# Altium PCB Multivibrator.PcbDoc
Units mm, origin at the board's own origin, x right, y up, seen from the top; angles counter-clockwise.
Board outline 100 x 100 mm, 2 copper layers (Top Layer, Bottom Layer); 9 components, 6 nets, 20 pads, 0 vias.
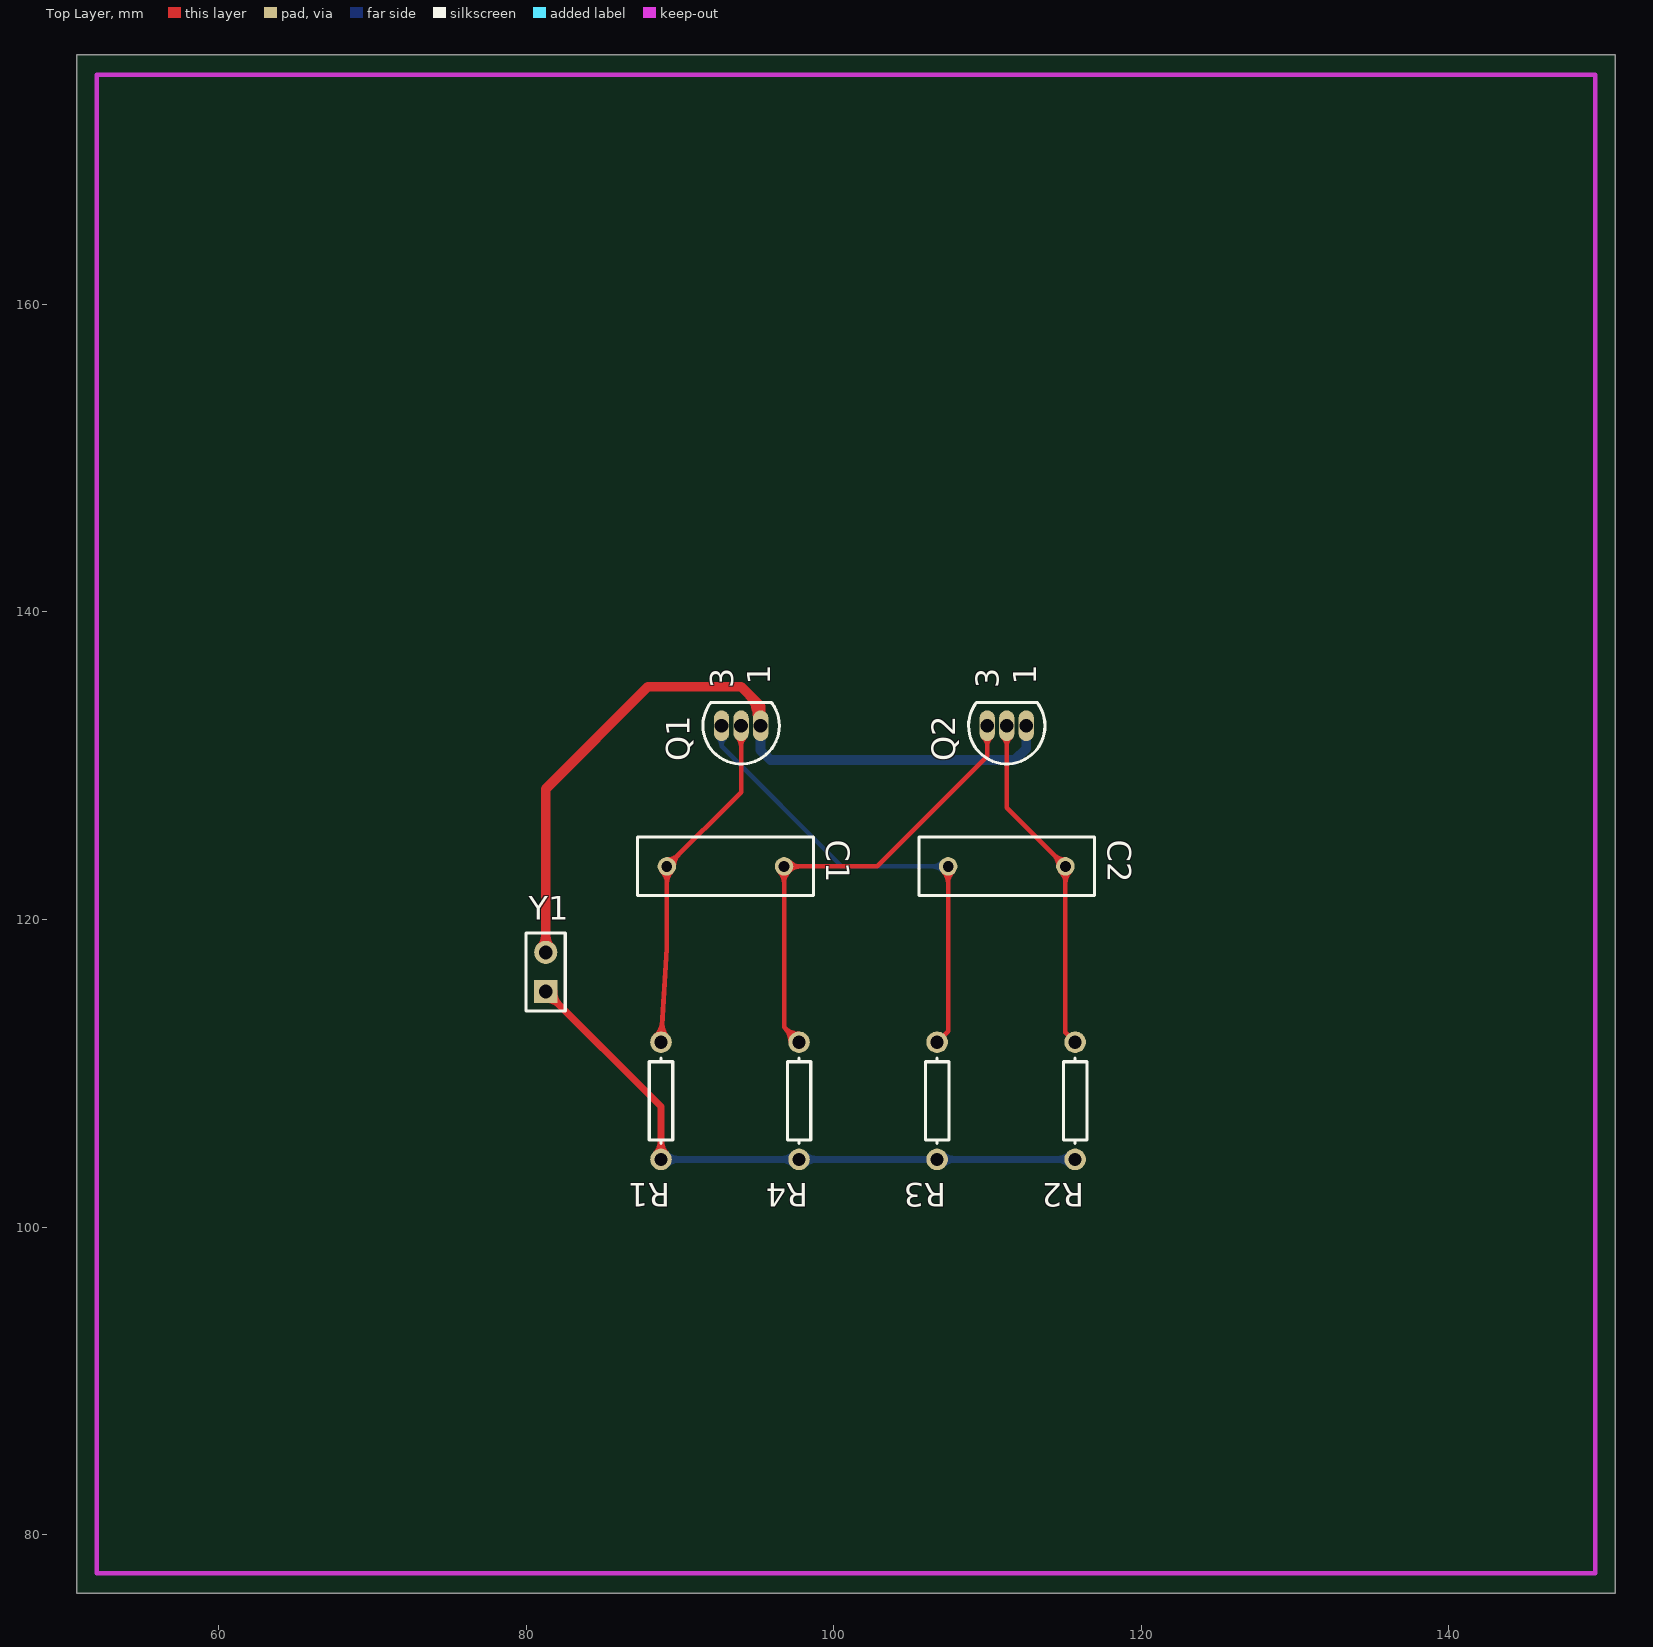
[diagram p0: Top Layer view]
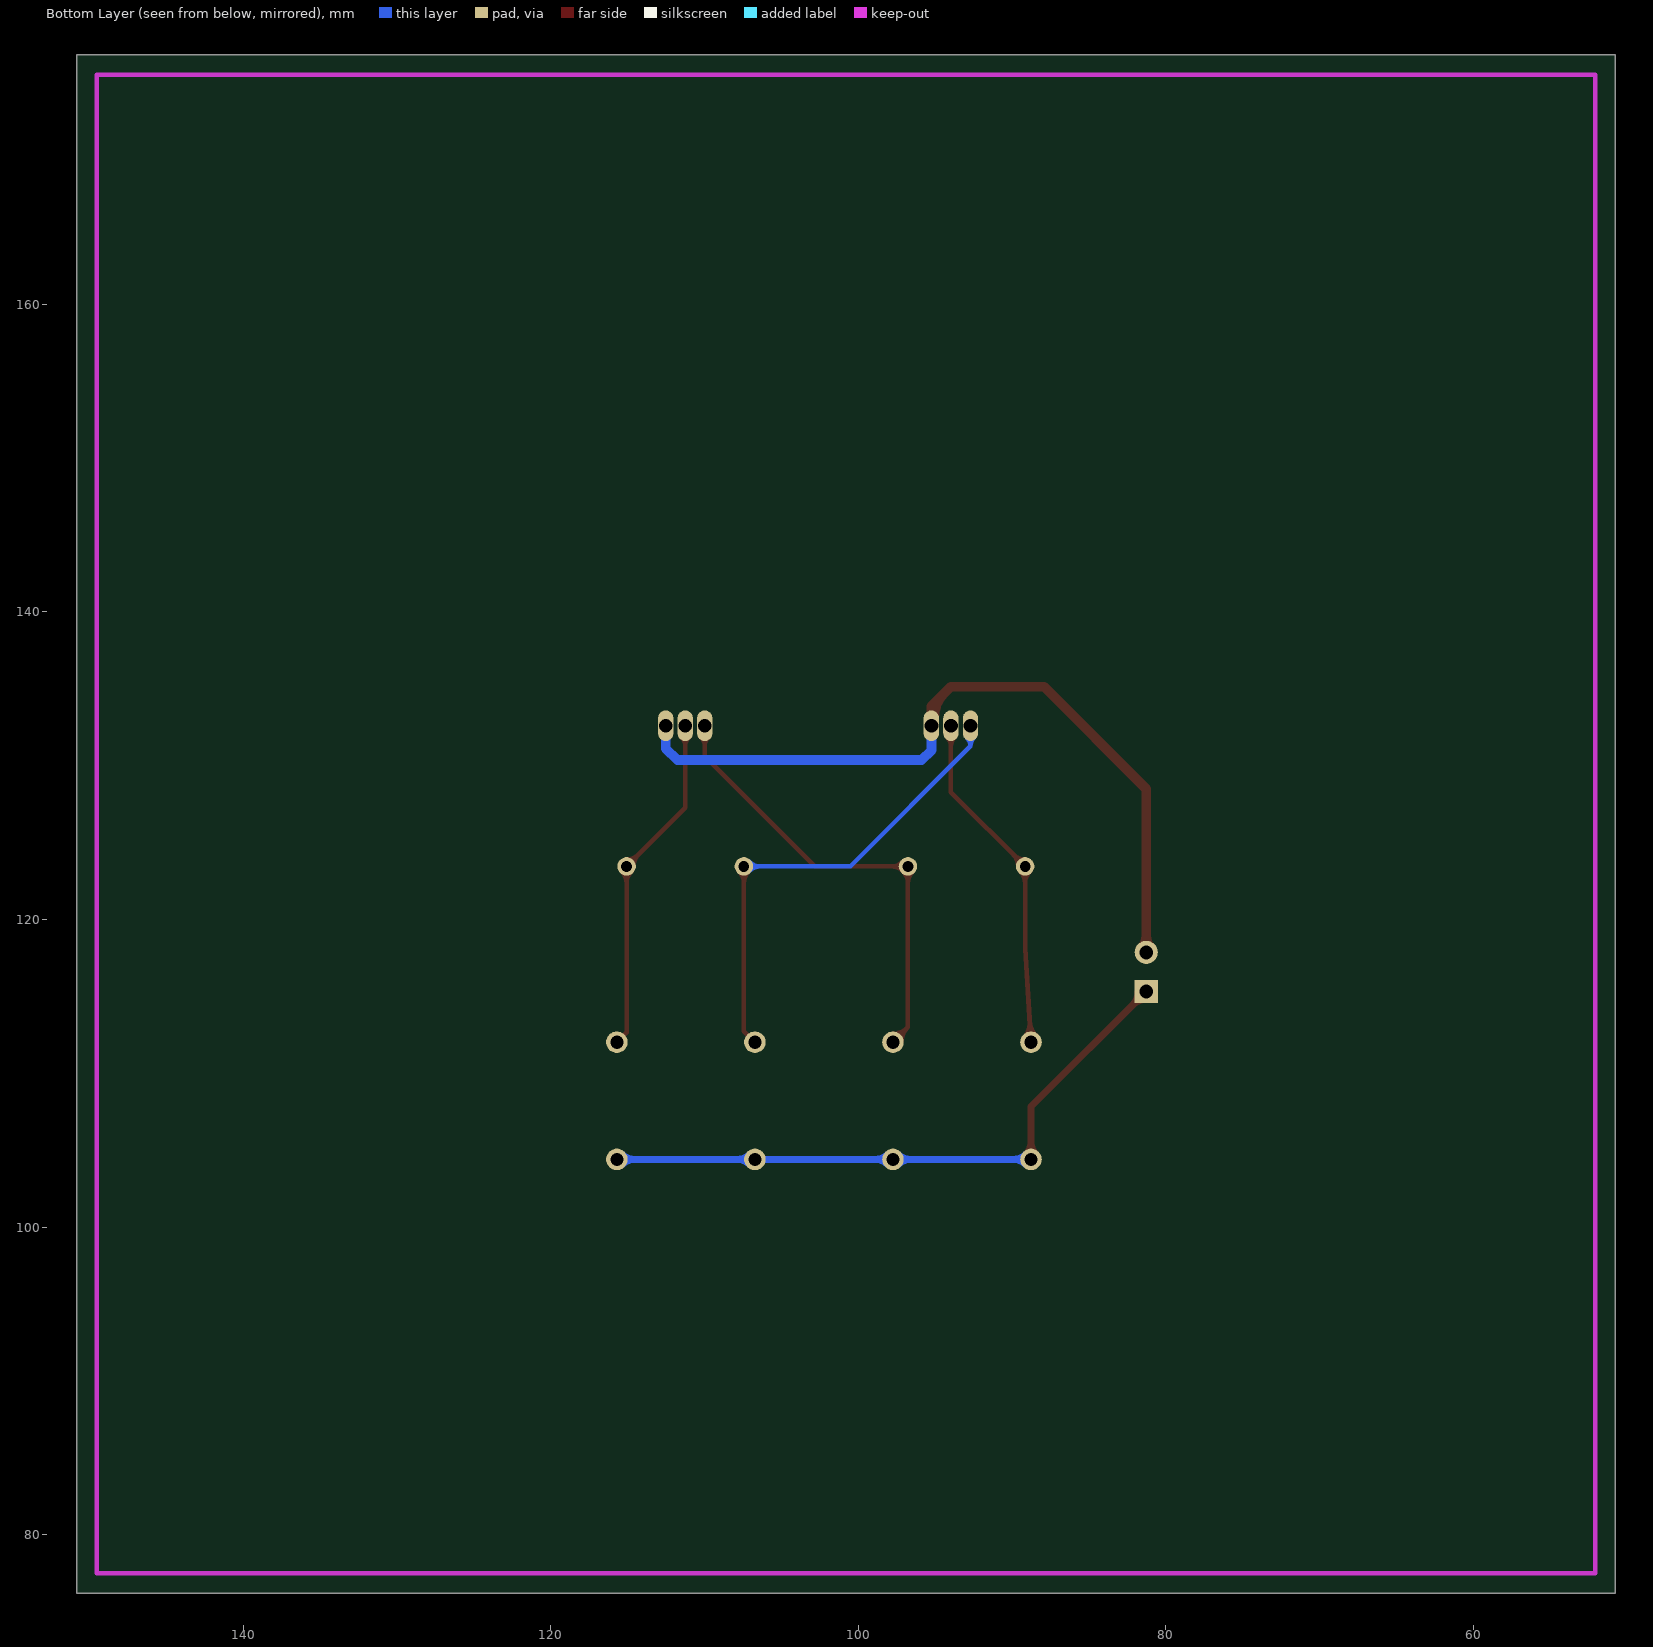
[diagram p1: Bottom Layer view, seen from below]

## Layer stack, top to bottom
Top Layer: signal copper 0.0356
Dielectric: dielectric 0.32, FR-4, Dk 4.8
Bottom Layer: signal copper 0.0356

## Board outline
50.8,76.2 150.8,76.2 150.8,176.2 50.8,176.2

## Design rules (kind name [scope] priority, off if disabled: settings)
Clearance Clearance_1 [HasFootprintPad('TO-92A' ,'*')] p1: gap=0.254
Clearance [All] p2: gap=0.3
MinimumSolderMaskSliver [All] p1 off: minsoldermaskwidth=0.254
PolygonConnect [All] p1: connectstyle=Relief reliefconductorwidth=0.254 reliefentries=4 polygonreliefangle="90 Angle"
RoomDefinition Multivibrator [InComponentClass('Multivibrator')] p1: confinementstyle=ConfineIn formatcopy=TRUE lockcomponents=FALSE outline 0,0 50.8,0 50.8,25.4 0,25.4
RoutingVias [All] p1: holewidth=0.8 width=1.6 viastyle="Through Hole" minholewidth=0.711 minwidth=1.27 maxholewidth=0.711 maxwidth=1.27
SilkscreenOverComponentPads [All] p1 off: minsilkscreentomaskgap=0.254
SolderMaskExpansion [All] p1: expansion=0.102
TestPointUsage [All] p1: valid=0 allowmultiple=FALSE
Testpoint [All] p1: side=15 testpointundercomponent=TRUE minsize=1.016 maxsize=2.54 preferedsize=1.524 minholesize=0 maxholesize=1.016 preferedholesize=0.813 testpointgrid=0.025 style=1023 order=0123456789
Width GND [InNet('GND')] p1: maxlimit=0.635 minlimit=0.254 preferedwidth=0.254 toplayer_minwidth=0.635 toplayer_prefwidth=0.635 bottomlayer_minwidth=0.635 bottomlayer_prefwidth=0.635 minimp=50.000000 maximp=50.000000 favimp=50.000000
Width +12V [InNet('+12V')] p2: maxlimit=0.457 minlimit=0.254 preferedwidth=0.254 toplayer_minwidth=0.457 toplayer_prefwidth=0.457 bottomlayer_minwidth=0.457 bottomlayer_prefwidth=0.457 minimp=50.000000 maximp=50.000000 favimp=50.000000
Width [All] p3: maxlimit=0.3 minlimit=0.3 preferedwidth=0.3
22 further rules are at their usual default settings.

## Components (designator, comment, footprint, x,y, rotation, side; value= is the part's Value field where it differs from the comment)
C1 "20nF" RAD-0.3 92.964,123.444 r0 top
C2 "20nF" RAD-0.3 111.252,123.444 r0 top
Q1 "2N3904" TO-92A 93.98,132.588 r90 top
Q2 "2N3904" TO-92A 111.252,132.588 r90 top
R1 "100K" AXIAL-0.3 88.773,108.204 r270 top
R2 "100K" AXIAL-0.3 115.697,108.204 r270 top
R3 "1K" AXIAL-0.3 106.722,108.204 r270 top
R4 "1K" AXIAL-0.3 97.748,108.204 r270 top
Y1 "Header 2" HDR1X2 81.28,115.316 r90 top

## Footprints (in the part's own frame and the unit in brackets; to place one, negate y for a bottom-side part, rotate by r counter-clockwise, add the part's x,y. Pads: shape width x height; smd on the part's side, far side on the other; paste and mask are expansions set on the pad)
AXIAL-0.3 [mm] "Resistor; 2 Leads"
  round 1.4 hole 0.85: 1(-3.81,0) 2(3.81,0)
  silkscreen extent -2.77,-0.76 2.77,0.76
HDR1X2 [mm] "Connector; Header; 2 Position"
  rect 1.5x1.5 hole 0.9: 1(0,0)
  round 1.5 hole 0.9: 2(2.54,0)
  silkscreen extent -1.27,-1.27 3.81,1.27
RAD-0.3 [mm] "Capacitor; 2 Leads"
  round 1.2 hole 0.7: 1(-3.81,0) 2(3.81,0)
  silkscreen extent -5.71,-1.91 5.71,1.91
TO-92A [mm] "TO, Flat Index; 3 In-Line, Axial Leads; Body Dia. 4.5mm; Leads 0.51 x 0.48 mm (max)"
  oval 2x1 hole 0.9: 1(0,-1.27) 2(0,0) 3(0,1.27)
  silkscreen extent -2.48,-2.48 1.5,2.48

## Part data
C1 C2: library part Cap, "Capacitor"
Q1 Q2: "NPN General Purpose Amplifier"
R1 R2 R3 R4: library part Res1, "Resistor"
Y1: "Header, 2-Pin"

## Nets (pads, with @x,y where several pads share a name; then routed paths per layer and width w, separated by ;. In a path a pad name is that pad's centre, name@x,y a point inside that pad or via, vN(x,y) a via of type N, cw(c..) or ccw(c..) an arc to the next point about the centre after c; other vN are vias at no path point)
+12V: R1.2 R2.2 R3.2 R4.2 Y1.1 | length 53.7
  Top Layer w0.457: Y1.1@81.28,114.795 cw(c81.28,113.536) 82.17,114.426 cw(c83.06,115.316) Y1.1@81.801,115.316 ; Y1.1 88.773,107.823 R1.2 ; R1.2@88.44,104.727 ccw(c87.635,105.532) 88.773,105.532 ccw(c89.911,105.532) R1.2@89.106,104.727
  Bottom Layer w0.457: R1.2 R4.2 R3.2 R2.2 ; R1.2@89.106,104.061 cw(c89.911,103.256) 89.911,104.394 cw(c89.911,105.532) R1.2@89.106,104.727 ; R4.2@97.414,104.061 ccw(c96.61,103.256) 96.61,104.394 ccw(c96.61,105.532) R4.2@97.414,104.727 ; R4.2@98.081,104.061 cw(c98.886,103.256) 98.886,104.394 cw(c98.886,105.532) R4.2@98.081,104.727 ; R3.2@107.056,104.061 cw(c107.86,103.256) 107.86,104.394 cw(c107.86,105.532) R3.2@107.056,104.727 ; R2.2@115.364,104.061 ccw(c114.559,103.256) 114.559,104.394 ccw(c114.559,105.532) R2.2@115.364,104.727
GND: Q1.1 Q2.1 Y1.2 | length 53.5
  Top Layer w0.635: Y1.2@80.974,118.162 ccw(c80.236,118.9) 81.28,118.9 ccw(c82.324,118.9) Y1.2@81.586,118.162 ; Y1.2 81.28,128.473 87.935,135.128 93.98,135.128 95.25,133.858 Q1.1 ; 94.394,134.714 cw(c92.768,133.088) Q1.1@95.068,133.088
  Bottom Layer w0.635: Q1.1 95.25,130.988 95.885,130.353 111.76,130.353 112.522,131.115 Q2.1
NetC1_1: C1.1 Q1.2 R1.1 | length 29.4
  Top Layer w0.3: R1.1@88.409,112.426 ccw(c87.531,113.422) 88.856,113.339 ccw(c90.181,113.256) R1.1@89.185,112.378 ; R1.1 89.154,118.11 C1.1 93.98,128.27 Q1.2 ; C1.1@88.836,123.126 cw(c88.068,122.358) 89.154,122.358 cw(c90.24,122.358) C1.1@89.472,123.126 ; C1.1@89.154,123.894 ccw(c89.154,124.98) 89.922,124.212 ccw(c90.69,123.444) C1.1@89.604,123.444 ; Q1.2@93.733,131.841 cw(c93.135,131.243) 93.98,131.243 cw(c94.825,131.243) Q1.2@94.227,131.841
NetC1_2: C1.2 Q2.3 R4.1 | length 36.8
  Top Layer w0.3: C1.2@96.456,123.126 cw(c95.688,122.358) 96.774,122.358 cw(c97.86,122.358) 97.092,123.126 cw(c97.86,122.358) 97.86,123.444 cw(c97.86,124.53) C1.2@97.092,123.762 ; R4.1@97.198,112.014 ccw(c95.87,112.014) 96.809,112.953 ccw(c97.748,113.892) R4.1@97.748,112.564 ; R4.1 96.774,112.988 C1.2 102.819,123.444 109.982,130.607 Q2.3 ; Q2.3@109.735,131.841 cw(c109.137,131.243) 109.982,131.243 cw(c110.827,131.243) Q2.3@110.229,131.841
NetC2_1: C2.1 Q1.3 R3.1 | length 35.8
  Top Layer w0.3: R3.1 107.442,112.734 C2.1 ; C2.1@107.124,123.126 cw(c106.356,122.358) 107.442,122.358 cw(c108.528,122.358) C2.1@107.76,123.126
  Bottom Layer w0.3: Q1.3@92.463,131.841 cw(c91.865,131.243) 92.71,131.243 cw(c93.555,131.243) Q1.3@92.957,131.841 ; Q1.3 92.71,131.242 100.508,123.444 C2.1 ; C2.1@107.124,123.126 ccw(c106.356,122.358) 106.356,123.444 ccw(c106.356,124.53) C2.1@107.124,123.762
NetC2_2: C2.2 Q2.2 R2.1 | length 27.2
  Top Layer w0.3: Q2.2@111.005,131.841 cw(c110.407,131.243) 111.252,131.243 cw(c112.097,131.243) Q2.2@111.499,131.841 ; Q2.2 111.252,127.254 C2.2 115.062,112.649 R2.1 ; C2.2@114.612,123.444 ccw(c113.526,123.444) 114.294,124.212 ccw(c115.062,124.98) C2.2@115.062,123.894 ; C2.2@114.744,123.126 cw(c113.976,122.358) 115.062,122.358 cw(c116.148,122.358) C2.2@115.38,123.126

## Keep-outs
Keep-Out Layer:
  lines w0.3: 52.1,77.5 52.1,174.9 149.5,174.9 149.5,77.5 52.1,77.5

## Text inside footprints (layer, text, board x,y; h text height)
Q1: Top Overlay "3" at 93.47,135.018 h1.5 r90; Top Overlay "1" at 95.88,135.248 h1.5 r90
Q2: Top Overlay "3" at 110.742,135.018 h1.5 r90; Top Overlay "1" at 113.152,135.248 h1.5 r90